# Altium PCB PCB1.pcbdoc
Units mm, origin at the board's own origin, x right, y up, seen from the top; angles counter-clockwise.
Board outline 32.4 x 29.18 mm, 2 copper layers (Top Layer, Bottom Layer); 28 components, 16 nets, 106 pads, 4 vias.
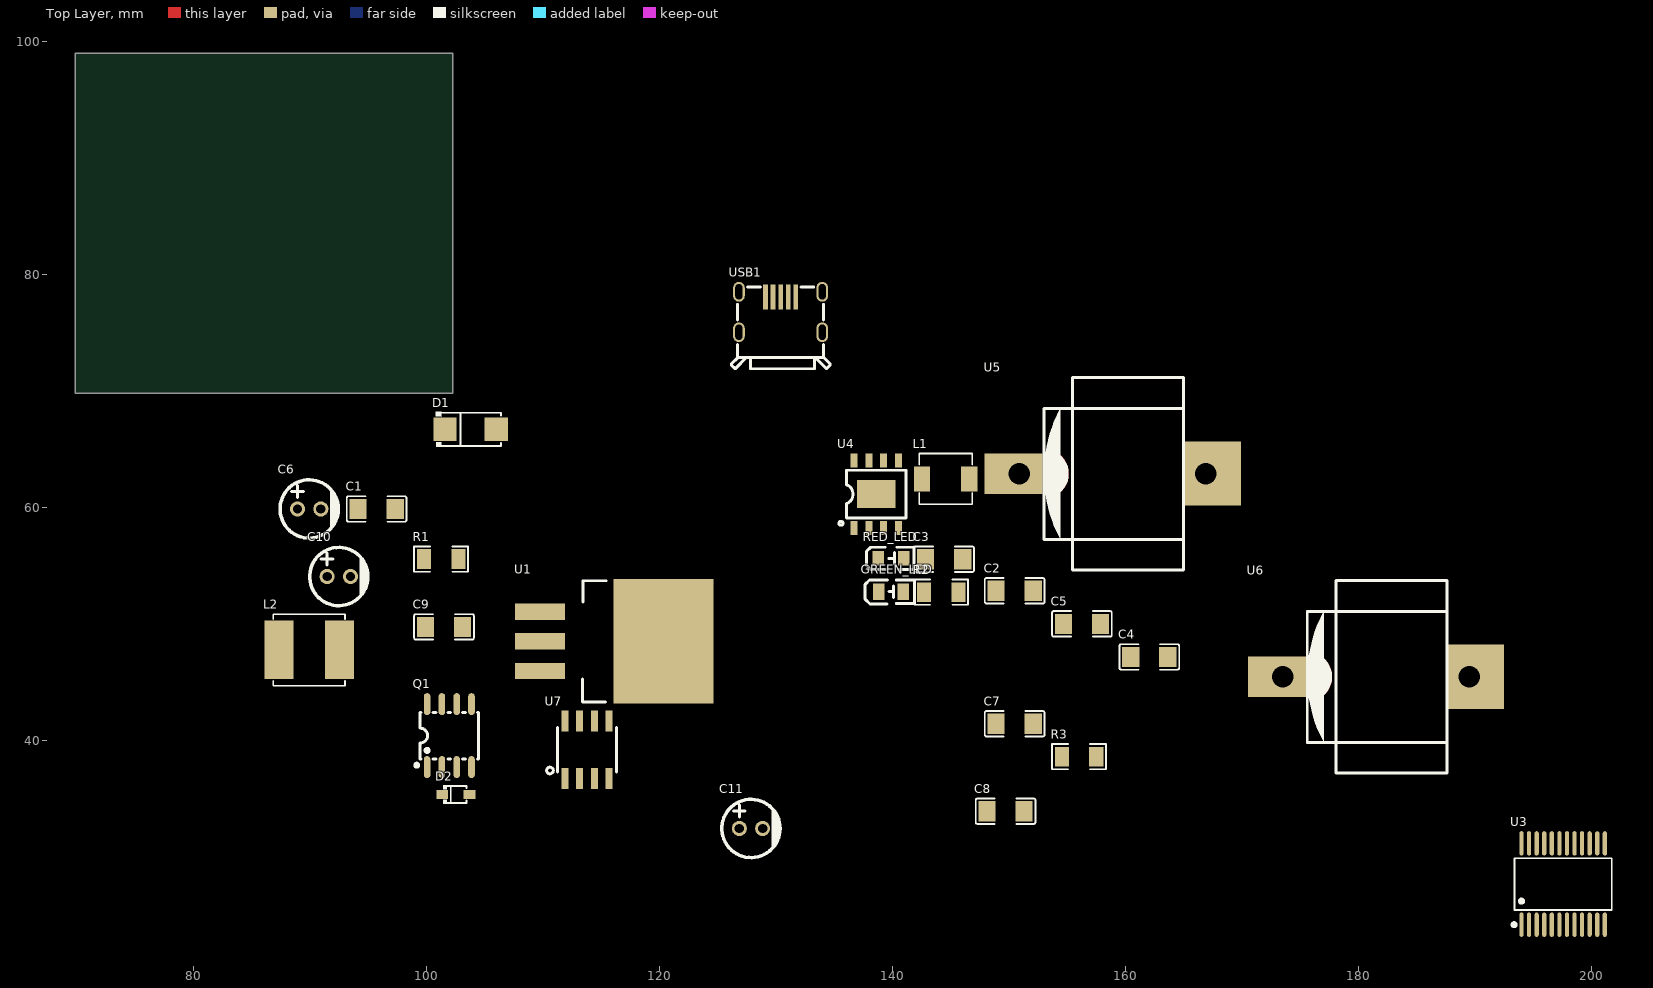
[diagram p0: Top Layer view]
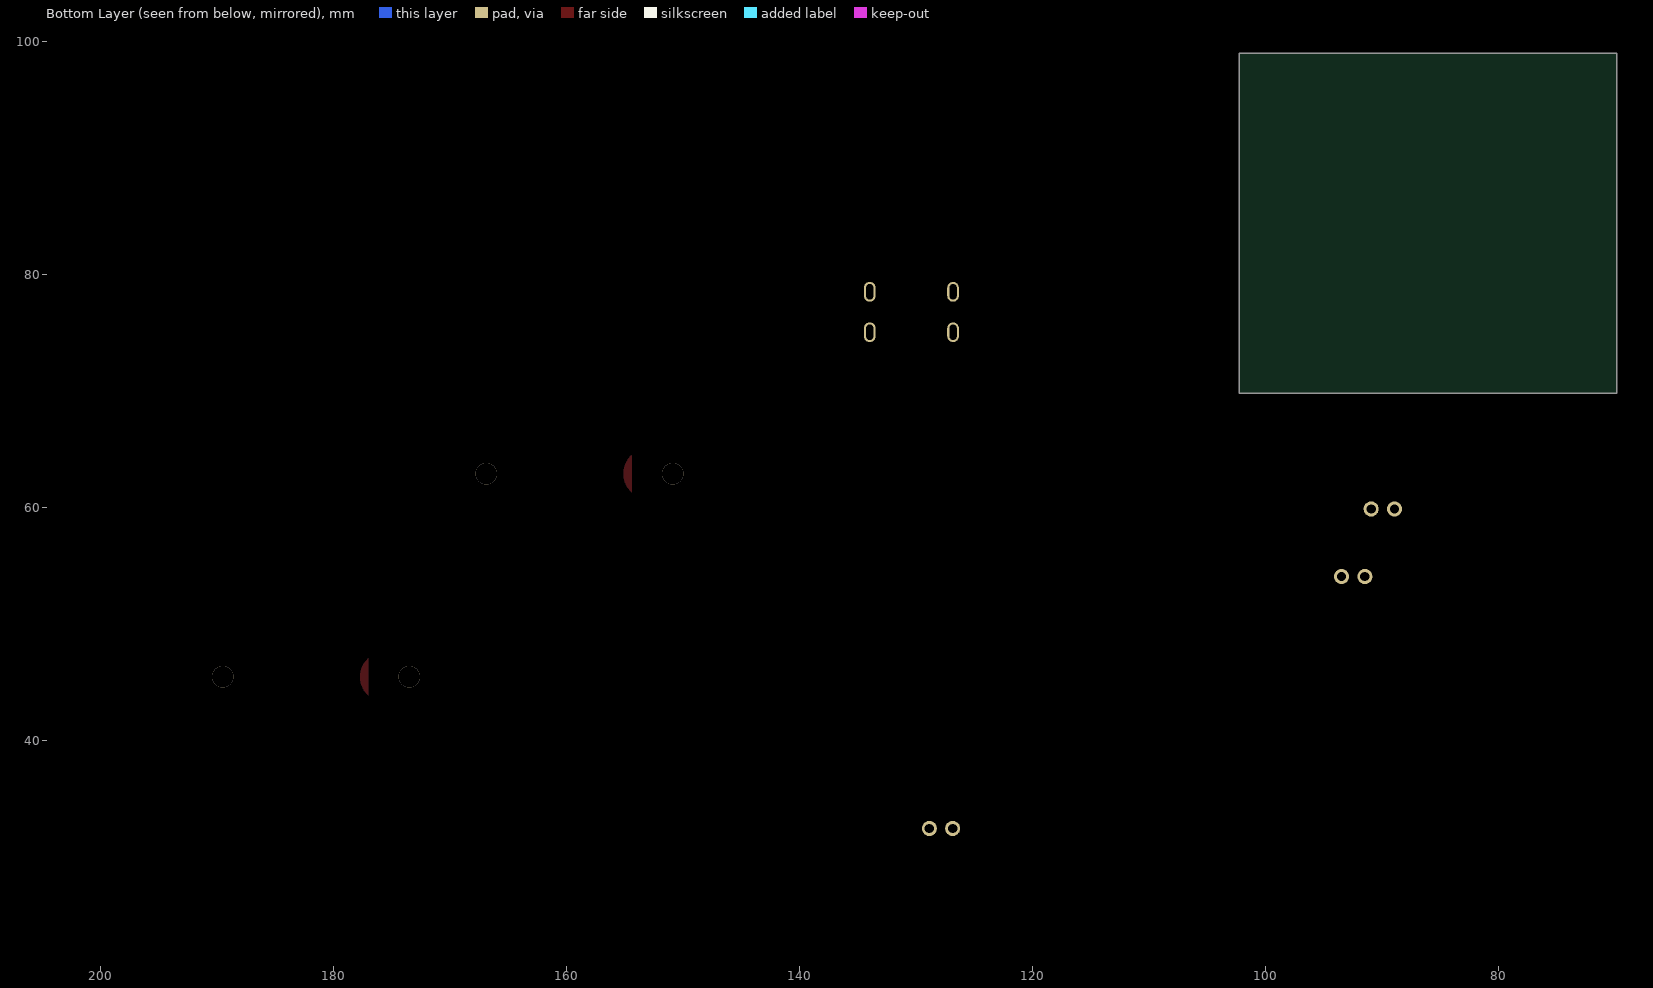
[diagram p1: Bottom Layer view, seen from below]

## Layer stack, top to bottom
Top Solder: solder mask 0.0102, Solder Resist, Dk 3.5
Top Layer: signal copper 0.0356
Dielectric 1: dielectric 0.32, FR-4, Dk 4.8
Bottom Layer: signal copper 0.0356
Bottom Solder: solder mask 0.0102, Solder Resist, Dk 3.5

## Board outline
102.25,69.85 69.85,69.85 69.85,99.026 102.25,99.026

## Components (designator, comment, footprint, x,y, rotation, side; value= is the part's Value field where it differs from the comment)
C1 "" C1206 95.731,59.905 r0 top
C2 "" C1206 150.475,52.885 r0 top
C3 "" C1206 144.42,55.586 r0 top
C4 "" C1206 162.034,47.209 r0 top
C5 "" C1206 156.255,50.047 r0 top
C6 "" CAP-TH_BD5.0-P2.00-D0.8-FD 89.941,59.905 r0 top
C7 "" C1206 150.475,41.473 r0 top
C8 "" C1206 149.695,33.97 r0 top
C9 "" C1206 101.51,49.786 r0 top
C10 "" CAP-TH_BD5.0-P2.00-D0.8-FD 92.481,54.105 r0 top
C11 "" CAP-TH_BD5.0-P2.00-D0.8-FD 127.852,32.489 r0 top
D1 "" SMA_L4.3-W2.6-LS5.1-RD 103.798,66.741 r0 top
D2 "" SOD-323_L1.8-W1.3-LS2.5-RD 102.528,35.402 r0 top
GREEN_LED "" LED0805-R-RD 139.873,52.803 r0 top
L1 "" IND-SMD_L4.4-W4.2 144.558,62.481 r0 top
L2 "" IND-SMD_L6.0-W6.0_SWPA6045S 89.941,47.802 r0 top
Q1 "" SO-8_L4.9-W3.9-P1.27-LS5.9-BL 101.964,40.456 r0 top
R1 "" R1206 101.258,55.6 r0 top
R2 "" R1206 144.168,52.762 r0 top
R3 "" R1206 156.002,38.649 r0 top
RED_LED "" LED0805-RD_RED 139.873,55.668 r0 top
U1 "" TO-263-3L_L10.0-W9.2-P2.54-TL 115.05,48.543 r0 top
U3 "" SSOP-24_L8.4-W5.8-P0.65-LS7.8-BL 197.545,27.718 r0 top
U4 "" ESOP-8_L4.9-W3.9-P1.27-LS6.0-BL-EP 138.603,61.175 r0 top
U5 "电池正极" BAT-SMD_MY-18650-02 158.885,62.931 r0 top
U6 "电池负极" BAT-SMD_MY-18650-02 181.485,45.508 r0 top
U7 "" SO-8_L4.9-W3.9-P1.27-LS6.0-BL 113.78,39.24 r0 top
USB1 "" MICRO-USB-SMD_KH-MICRO-SMT.ZJ-5P 130.392,76.804 r0 top

## Footprints (in the part's own frame and the unit in brackets; to place one, negate y for a bottom-side part, rotate by r counter-clockwise, add the part's x,y. Pads: shape width x height; smd on the part's side, far side on the other; paste and mask are expansions set on the pad)
BAT-SMD_MY-18650-02 [mm]
  rect 5x3.5 smd: 1(-8.5,0)
  rect 5x5.5 smd: 2(8.5,0)
  Top Layer region: -4.474,1.576 -4.5,1.6 -4.5,-1.6 -4.452,-1.555 -4.405,-1.509 -4.359,-1.461 -4.315,-1.411 -4.272,-1.361 -4.231,-1.309 -4.192,-1.256 -4.154,-1.201 -4.118,-1.146 -4.084,-1.089 -4.051,-1.032 -4.02,-0.973 -3.991,-0.914 -3.964,-0.853 -3.939,-0.792 -3.916,-0.731 -3.894,-0.668 -3.875,-0.605 -3.857,-0.541 -3.841,-0.477 -3.828,-0.412 -3.816,-0.347 -3.806,-0.281 -3.799,-0.216 -3.793,-0.15 -3.79,-0.084 -3.788,-0.018 -3.788,0.048 -3.791,0.115 -3.795,0.181 -3.802,0.246 -3.811,0.312 -3.821,0.377 -3.834,0.442 -3.848,0.507 -3.865,0.571 -3.883,0.634 -3.904,0.697 -3.926,0.759 -3.951,0.821 -3.977,0.882 -4.005,0.942 -4.034,1.001 -4.066,1.059 -4.1,1.116 -4.135,1.172 -4.171,1.227 -4.21,1.28 -4.25,1.333 -4.292,1.384 -4.335,1.434 -4.38,1.483 -4.426,1.53
  silkscreen extent -5.9,-8.25 6.1,8.25
C1206 [mm]
  rect 1.485x1.728 smd: 1(-1.593,0) 2(1.593,0)
  silkscreen extent -2.56,-1.09 2.56,1.09
CAP-TH_BD5.0-P2.00-D0.8-FD [mm]
  round 1.3 hole 0.8: 1(-1,0) 2(1,0)
  silkscreen extent -2.5,-2.5 2.5,2.5
ESOP-8_L4.9-W3.9-P1.27-LS6.0-BL-EP [mm]
  rect 0.6x1.2 smd: 1(-1.905,-2.908) 2(-0.635,-2.908) 3(0.635,-2.908) 4(1.905,-2.908) 5(1.905,2.908) 6(0.635,2.908) 7(-0.635,2.908) 8(-1.905,2.908)
  rect 3.3x2.4 smd: 9(0,0)
  silkscreen extent -3.2,-2.67 2.55,2.05
IND-SMD_L4.4-W4.2 [mil]
  rect 55.1x83.5 smd: 1(79.8,0) 2(-79.8,0)
  silkscreen extent -90,-86 90,86
IND-SMD_L6.0-W6.0_SWPA6045S [mm]
  rect 2.474x5.02 smd: 1(-2.603,0) 2(2.603,0)
  silkscreen extent -3.08,-3.08 3.08,3.08
LED0805-R-RD [mm]
  rect 1x1.4 smd: 1(1.05,0) 2(-1.05,0)
  silkscreen extent -2.22,-1.04 1.99,1.01
LED0805-RD_RED [mm]
  rect 1x1.25 smd: 1(-1.1,0) 2(1.1,0)
  silkscreen extent -2.1,-0.95 1.98,0.96
MICRO-USB-SMD_KH-MICRO-SMT.ZJ-5P [mm]
  rect 0.399x2.149 smd: 1(-1.3,1.306) 2(-0.65,1.306) 3(0,1.306) 4(0.65,1.306) 5(1.3,1.306)
  oval 1.001x1.699 hole 0.599 slot 1.3 at 90 deg: 6(3.576,1.735) 7(3.576,-1.735) 8(-3.574,-1.735) 9(-3.574,1.735)
  Multi-Layer board cut-out: 2.299,0.414 2.269,0.544 2.186,0.648 2.066,0.706 1.932,0.706 1.812,0.648 1.729,0.544 1.699,0.414 1.699,0.414 1.729,0.284 1.812,0.18 1.932,0.122 2.066,0.122 2.186,0.18 2.269,0.284 2.299,0.414
  Multi-Layer board cut-out: -1.699,0.414 -1.729,0.544 -1.812,0.648 -1.932,0.706 -2.066,0.706 -2.186,0.648 -2.269,0.544 -2.299,0.414 -2.299,0.414 -2.269,0.284 -2.186,0.18 -2.066,0.122 -1.932,0.122 -1.812,0.18 -1.729,0.284 -1.699,0.414
  silkscreen extent -4.22,-4.87 4.26,2.16
R1206 [mm]
  rect 1.208x1.701 smd: 1(-1.479,0) 2(1.479,0)
  silkscreen extent -2.31,-1.08 2.31,1.08
SMA_L4.3-W2.6-LS5.1-RD [mm]
  rect 1.999x1.999 smd: 1(-2.2,0) 2(2.2,0)
  silkscreen extent -2.98,-1.5 2.6,1.5
SO-8_L4.9-W3.9-P1.27-LS5.9-BL [mm]
  oval 0.574x1.887 smd: 1(-1.905,-2.7) 2(-0.635,-2.7) 3(0.635,-2.7) 4(1.905,-2.7) 5(1.905,2.7) 6(0.635,2.7) 7(-0.635,2.7) 8(-1.905,2.7)
  silkscreen extent -2.94,-2.69 2.5,2
SO-8_L4.9-W3.9-P1.27-LS6.0-BL [mil]
  rect 23.6x70.9 smd: 1(-75,-96.5) 2(-25,-96.5) 3(25,-96.5) 4(75,-96.5) 5(75,96.5) 6(25,96.5) 7(-25,96.5) 8(-75,96.5)
  silkscreen extent -136,-81 100,75
SOD-323_L1.8-W1.3-LS2.5-RD [mm]
  rect 1x0.75 smd: 1(-1.173,0) 2(1.173,0)
  silkscreen extent -1.08,-0.8 0.9,0.8
SSOP-24_L8.4-W5.8-P0.65-LS7.8-BL [mm]
  oval 0.364x2.082 smd: 1(-3.575,-3.491) 2(-2.925,-3.491) 3(-2.275,-3.491) 4(-1.625,-3.491) 5(-0.975,-3.491) 6(-0.325,-3.491) 7(0.325,-3.491) 8(0.975,-3.491) 9(1.625,-3.491) 10(2.275,-3.491) 11(2.925,-3.491) 12(3.575,-3.491) 13(3.575,3.491) 14(2.925,3.491) 15(2.275,3.491) 16(1.625,3.491) 17(0.975,3.491) 18(0.325,3.491) 19(-0.325,3.491) 20(-0.975,3.491) 21(-1.625,3.491) 22(-2.275,3.491) 23(-2.925,3.491) 24(-3.575,3.491)
  silkscreen extent -4.36,-3.64 4.18,2.22
TO-263-3L_L10.0-W9.2-P2.54-TL [mm]
  rect 4.3x1.4 smd: 1(-5.301,2.54) 2(-5.301,0) 3(-5.301,-2.54)
  rect 8.6x10.701 smd: 4(5.301,0)
  silkscreen extent -1.64,-5.2 0.38,5.2

## Via types
v1: diameter 1.85, hole 1.85, Top Layer to Bottom Layer, 4 vias

## Nets (pads, with @x,y where several pads share a name; then routed paths per layer and width w, separated by ;. In a path a pad name is that pad's centre, name@x,y a point inside that pad or via, vN(x,y) a via of type N, cw(c..) or ccw(c..) an arc to the next point about the centre after c; other vN are vias at no path point)
$1N2476: C3.2 R2.2 U4.5 USB1.1
$1N2529: GREEN_LED.1 R2.1 RED_LED.2
$1N2544: RED_LED.1 U4.2
$1N2554: GREEN_LED.2 U4.4
$1N2852: D1.2 L1.1 U4.8
$1N2881: C2.2 C4.2 C5.2 L1.2 U4.6 U5.1 U6.1
$1N3033: R1.2 U4.3
$1N7089: C8.2 U7.5
$1N7498: Q1.3 R3.1 U7.8
$1N7852: Q1.4 U7.1
$1N8885: D2.2 L2.1 Q1.5
+3.3V: C7.2 U1.2 U1.4
+5V: C1.2 C6.1 C10.1 D1.1 L2.2 U1.3 U3.20 U4.1
+12V: C9.2 C11.1 D2.1 U3.13 U3.14 U3.24 U7.2
GND: C1.1 C2.1 C3.1 C4.1 C5.1 C6.2 C7.1 C8.1 C9.1 C10.2 C11.2 R1.1 R3.2 U1.1 U3.4 U3.5 U3.9 U3.10 U3.18 U4.7 U4.9 U6.2 U7.4 U7.6 U7.7 USB1.5
"": 
pads on no net: Q1.1 Q1.2 Q1.6 Q1.7 Q1.8 U3.1 U3.2 U3.3 U3.6 U3.7 U3.8 U3.11 U3.12 U3.15 U3.16 U3.17 U3.19 U3.21 U3.22 U3.23 U5.2 U7.3 USB1.2 USB1.3 USB1.4 USB1.6 USB1.7 USB1.8 USB1.9
copper on no net:
  other v1: 173.485,45.508 189.485,45.508 150.885,62.931 166.885,62.931